# Altium PCB PCB1.PcbDoc
Units mil, origin at the board's own origin, x right, y up, seen from the top; angles counter-clockwise.
Board outline 3745 x 3075 mil, 2 copper layers (Top Layer, Bottom Layer); 34 components, 26 nets, 238 pads, 5 vias.
Unrouted connection lines stored in the file: 12.
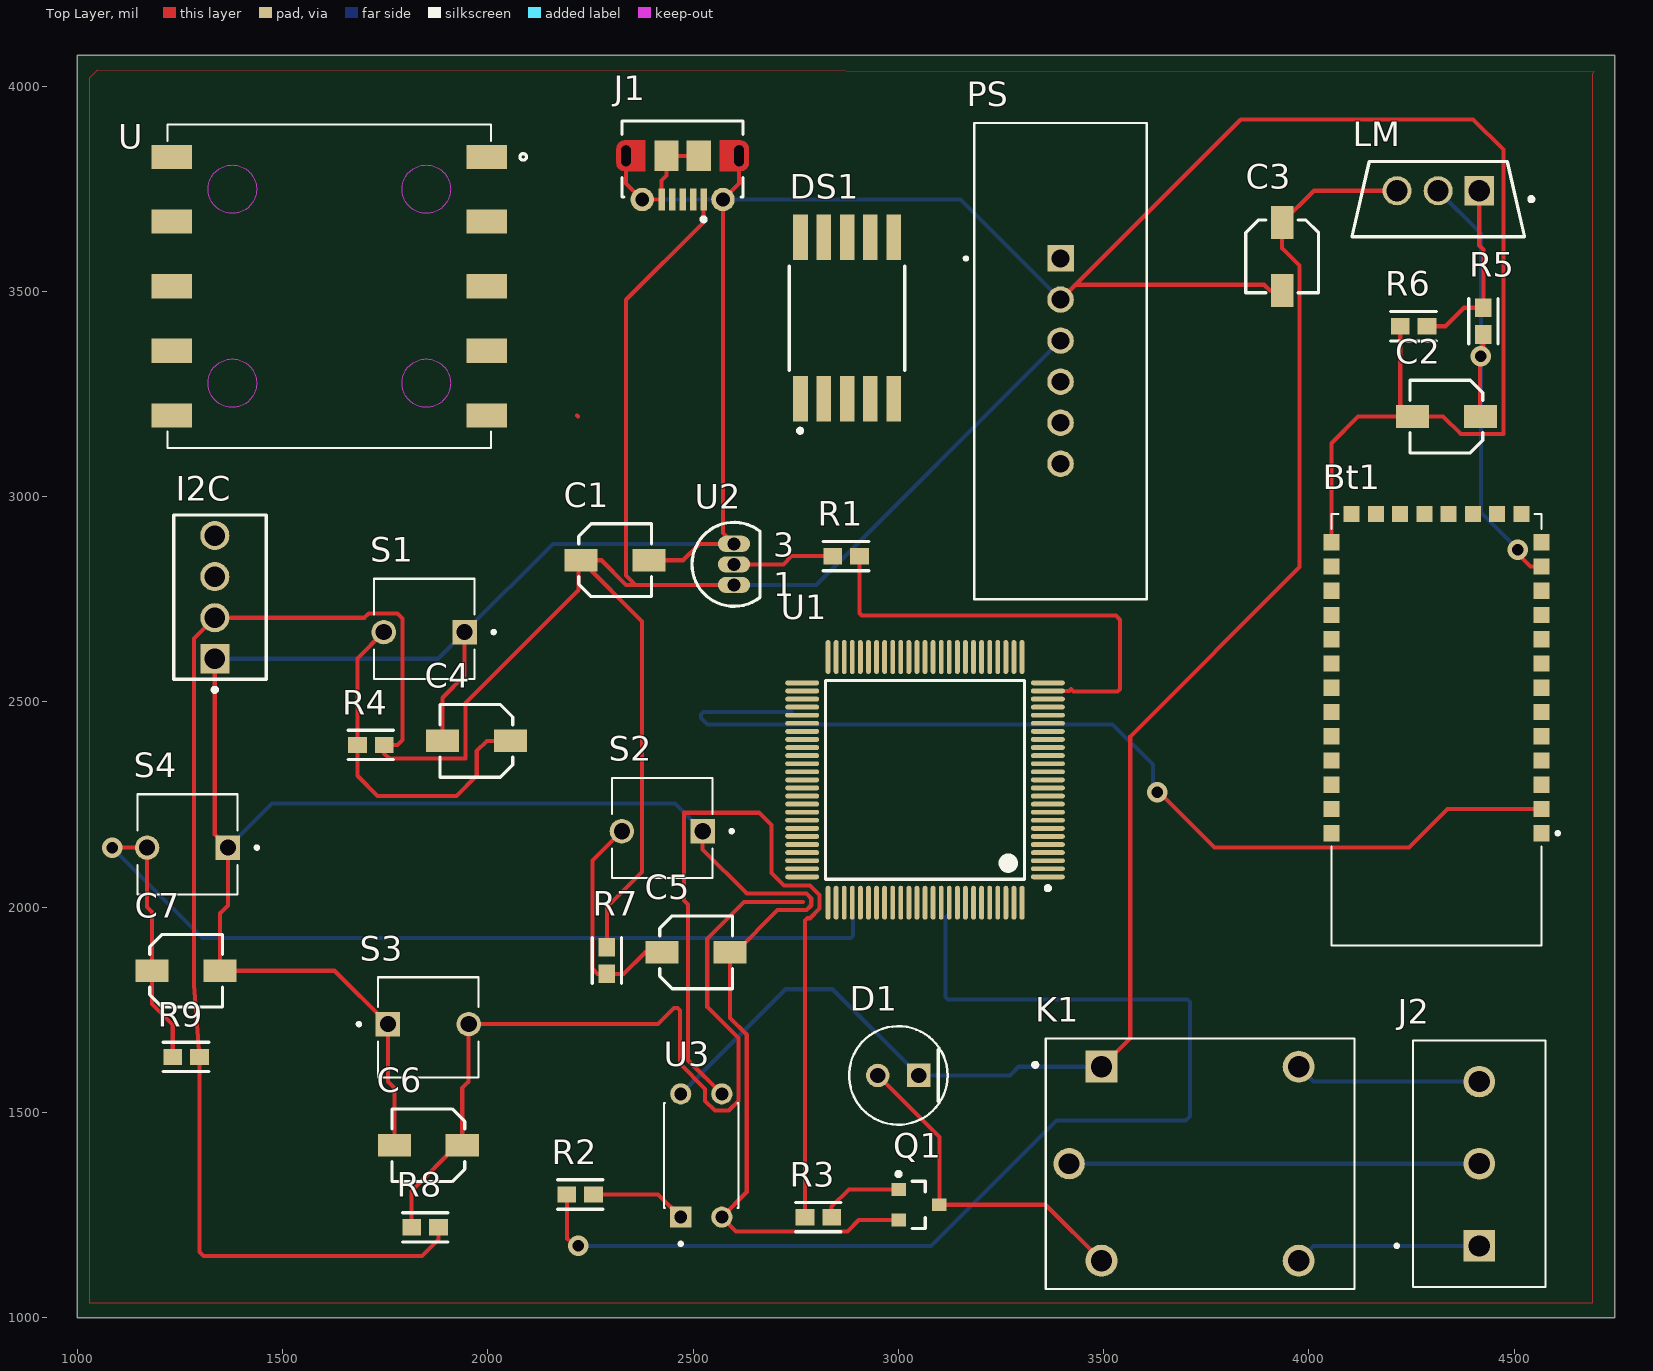
[diagram p0: Top Layer view]
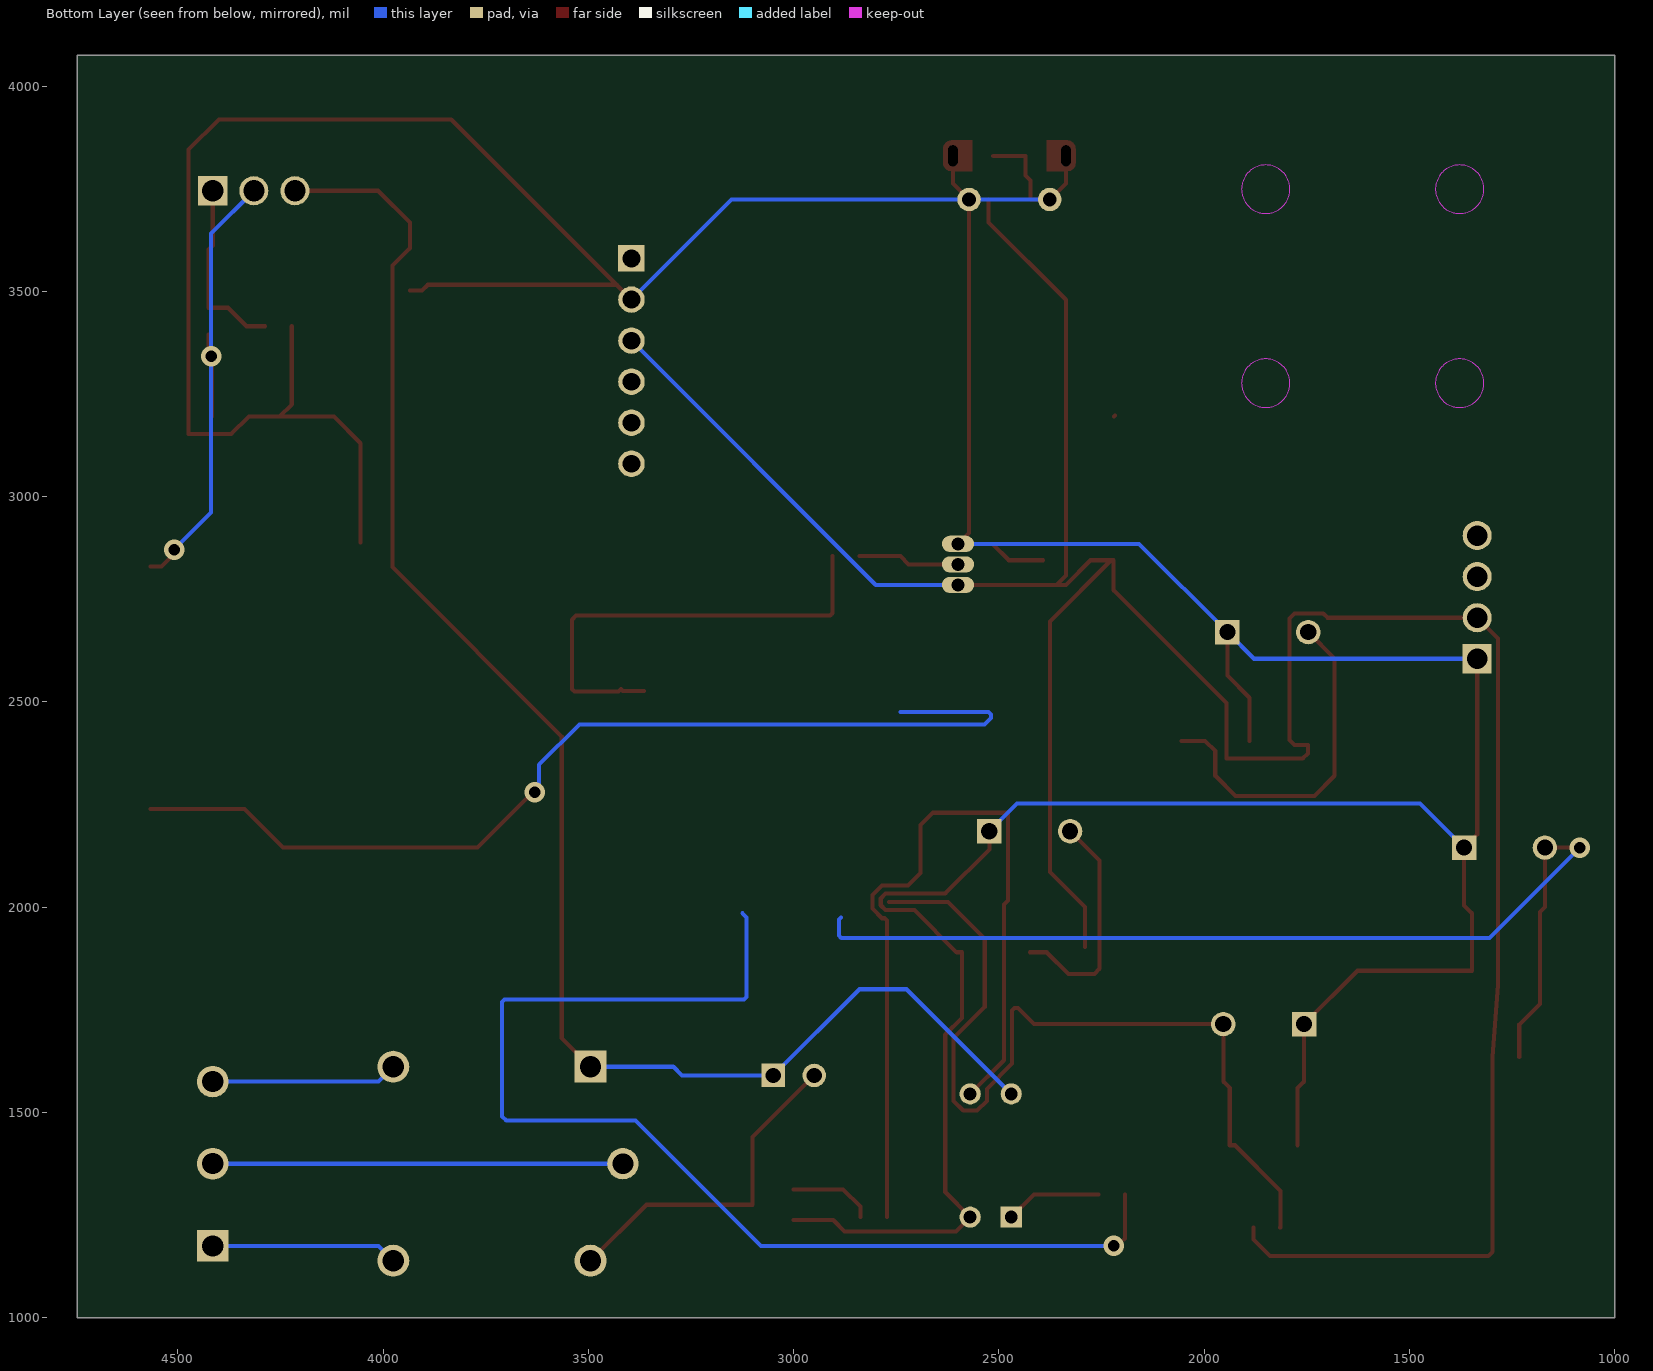
[diagram p1: Bottom Layer view, seen from below]

## Layer stack, top to bottom
Top Solder: solder mask 0.4, Solder Resist, Dk 3.5
Top Layer: signal copper 1.4
Dielectric 1: dielectric 12.6, FR-4, Dk 4.8
Bottom Layer: signal copper 1.4
Bottom Solder: solder mask 0.4, Solder Resist, Dk 3.5

## Board outline
1000,1000 4745,1000 4745,4075 1000,4075

## Design rules (kind name [scope] priority, off if disabled: settings)
Clearance [All] p1: gap=10 ignorepadtopadclearanceinfootprint=FALSE except(0: Arc-Hole Track-Hole SMDPad-Hole THPad-Hole Via-Hole Fill-Hole Poly-Hole Region-Hole Text-Hole)
PolygonConnect [All] p1: connectstyle=Relief reliefconductorwidth=10 reliefentries=4 polygonreliefangle="90 Angle" airgapwidth=10
RoutingVias [All] p1: holewidth=28 width=50 viastyle="Through Hole" minholewidth=28 minwidth=50 maxholewidth=28 maxwidth=50
SolderMaskExpansion [All] p1: expansion=4 istentingtop=FALSE
Width [All] p1: maxlimit=10 minlimit=10 preferedwidth=10
30 further rules are at their usual default settings.

## Components (designator, comment, footprint, x,y, rotation, side; value= is the part's Value field where it differs from the comment)
Bt1 "BLUETOOTH-HC-06" BLUETOOTH-SERIAL-HC-06 4310.91,2435.91 r180 top
C1 "EEE-1CA100SR" Capacitor 2309.84,2845 r0 top
C2 "EEE-1CA100SR" Capacitor 4335,3195 r180 top
C3 "EEE-1CA100SR" Capacitor 3935,3585 r270 top
C4 "EEE-1CA100SR" Capacitor 1972.32,2405 r180 top
C5 "EEE-1CA100SR" Capacitor 2507.32,1890 r0 top
C6 "EEE-1CA100SR" Capacitor 1855,1420 r180 top
C7 "EEE-1CA100SR" Capacitor 1265,1845 r0 top
D1 "HLMP-4700" Led 3000,1590 r180 top
DS1 "ACSC02-41SURKWA-F01" 7seg 2875,3435 r90 top
I2C "640456-4" Header4 1335,2755 r270 top
J1 "USB" USB-MICRO-B_V 2474.37,3776.85 r180 top
J2 "TB006" CUI_TB006-508-03BE 4415,1175 r90 top
K1 "Relay" RELAY 3735,1375 r0 top
LM "LM317KCT" LM317 4315,3724.63 r270 top
PS "PressionSensor" XDCR_MPX5010DP 3395,3330 r270 top
Q1 "MMBTA42LT1G" Transistor 3040,1275 r0 top
R1 "ESR03EZPJ331" resistor 2872.56,2855 r0 top
R2 "ESR03EZPJ331" resistor 2225,1300 r0 top
R3 "ESR03EZPJ331" resistor 2805,1245 r0 top
R4 "ESR03EZPJ331" resistor 1715,2395 r0 top
R5 "ESR03EZPJ331" resistor 4425,3427.44 r90 top
R6 "ESR03EZPJ331" resistor 4255,3415 r0 top
R7 "ESR03EZPJ331" resistor 2290,1870 r90 top
R8 "ESR03EZPJ331" resistor 1847.44,1220 r0 top
R9 "ESR03EZPJ331" resistor 1265,1635 r0 top
S1 "switcher" switcher 1845,2670 r180 top
S2 "switcher" switcher 2425,2185 r180 top
S3 "switcher" switcher 1855,1715 r0 top
S4 "switcher" switcher 1268.43,2145 r180 top
U "MouvementSensor" Mouvementsensor 1613.86,3512.52 r180 top
U1 "STM32F407VGT6J" Stm32 3065,2310 r180 top
U2 "TMP35GT9Z" TMP35 2599.84,2835 r0 top
U3 "LTV816" LTV 2520,1395 r90 top

## Footprints (in the part's own frame and the unit in brackets; to place one, negate y for a bottom-side part, rotate by r counter-clockwise, add the part's x,y. Pads: shape width x height; smd on the part's side, far side on the other; paste and mask are expansions set on the pad)
7seg [mm]
  rect 2.8x0.9 smd paste+0 mask+0: 1(-5,2.88) 2(-5,1.44) 3(-5,0) 4(-5,-1.44) 5(-5,-2.88) 6(5,-2.88) 7(5,-1.44) 8(5,0) 9(5,1.44) 10(5,2.88)
  silkscreen extent -7.1,-3.57 3.22,3.57, body extent -6.5,-3.67 6.5,3.67, height 0.25
BLUETOOTH-SERIAL-HC-06 [mm]
  rect 1x1 smd: 1(-6.5,6.5) 2(-6.5,5) 3(-6.5,3.5) 4(-6.5,2) 5(-6.5,0.5) 6(-6.5,-1) 7(-6.5,-2.5) 8(-6.5,-4) 9(-6.5,-5.5) 10(-6.5,-7) 11(-6.5,-8.5) 12(-6.5,-10) 13(-6.5,-11.5) 14(-5.25,-13.25) 15(-3.75,-13.25) 16(-2.25,-13.25) 17(-0.75,-13.25) 18(0.75,-13.25) 19(2.25,-13.25) 20(3.75,-13.25) 21(5.25,-13.25) 22(6.5,-11.5) 23(6.5,-10) 24(6.5,-8.5) 25(6.5,-7) 26(6.5,-5.5) 27(6.5,-4) 28(6.5,-2.5) 29(6.5,-1) 30(6.5,0.5) 31(6.5,2) 32(6.5,3.5) 33(6.5,5) 34(6.5,6.5)
  silkscreen extent -7.6,-13.25 6.5,13.45, body extent -7.01,-13.33 7.01,14.67, height 2.35
Capacitor [mm] "Aluminum Electrolytic Capacitor, 2-Leads, Body 4.5x4.5mm, IPC High Density"
  rect 2.05x1.4 smd: 1(-2.1,0) 2(2.1,0)
  silkscreen extent -2.25,-2.25 2.25,2.25, body extent -2.75,-2.25 2.75,2.25, height 5.5
CUI_TB006-508-03BE [mm]
  rect 1.95x1.95 / inner round 1.95 / far side rect 1.95x1.95 hole 1.3: 1(0,0)
  round 1.95 hole 1.3: 2(5.08,0) 3(10.16,0)
  silkscreen extent -2.54,-4.1 12.7,5.2, body extent -3.04,-4.1 12.7,4.1, height 10
Header4 [mm] "Through Hole, 4-Leads, Body 10.16x5.72mm, Pitch 2.54mm"
  rect 1.8x1.8 hole 1.27 paste+0: 1(3.81,0)
  round 1.8 hole 1.27 paste+0: 2(1.27,0) 3(-1.27,0) 4(-3.81,0)
  silkscreen extent -5.08,-2.54 5.86,3.18, body extent -5.08,-2.54 5.08,3.18, height 10.03
Led [mm]
  rect 1.45x1.45 hole 0.95 paste-1000 mask+0: 1(-1.27,0)
  round 1.45 hole 0.95 paste-1000 mask+0: 2(1.27,0)
  silkscreen extent -3.05,-3.05 3.05,3.05, body extent -3.15,-3.15 3.15,3.15, height 0.25
LM317 [mm]
  rect 1.8x1.8 hole 1.3 paste-1000 mask+0: 1(-0.517,2.54)
  round 1.8 hole 1.3 paste-1000 mask+0: 2(-0.517,0) 3(-0.517,-2.54)
  silkscreen extent -2.33,-5.34 2.33,5.89, body extent -2.42,-5.44 2.42,5.44, height 0.25
LTV [mm]
  rect 1.308x1.308 / inner round 1.308 / far side rect 1.308x1.308 hole 0.8: 1(-3.81,1.27)
  round 1.308 hole 0.8: 2(-3.81,-1.27) 3(3.81,-1.27) 4(3.81,1.27)
  silkscreen extent -5.56,-2.3 3.25,2.3, body extent -3.99,-2.3 3.99,2.3, height 5
Mouvementsensor [mm]
  rect 2.5x1.5 smd: 1(-9.75,-8) 2(-9.75,-4) 3(-9.75,0) 4(-9.75,4) 5(-9.75,8) 6(9.75,8) 7(9.75,4) 8(9.75,0) 9(9.75,-4) 10(9.75,-8)
  Keep-Out Layer region: -5.921,7.498 -5.843,7.492 -5.765,7.482 -5.688,7.467 -5.612,7.449 -5.536,7.427 -5.462,7.4 -5.39,7.37 -5.319,7.337 -5.25,7.299 -5.183,7.258 -5.118,7.214 -5.056,7.166 -4.996,7.115 -4.939,7.061 -4.885,7.004 -4.834,6.944 -4.786,6.882 -4.742,6.817 -4.701,6.75 -4.663,6.681 -4.63,6.61 -4.6,6.538 -4.573,6.464 -4.551,6.388 -4.533,6.312 -4.518,6.235 -4.508,6.157 -4.502,6.079 -4.5,6 -4.502,5.921 -4.508,5.843 -4.518,5.765 -4.533,5.688 -4.551,5.612 -4.573,5.536 -4.6,5.462 -4.63,5.39 -4.663,5.319 -4.701,5.25 -4.742,5.183 -4.786,5.118 -4.834,5.056 -4.885,4.996 -4.939,4.939 -4.996,4.885 -5.056,4.834 -5.118,4.786 -5.183,4.742 -5.25,4.701 -5.319,4.663 -5.39,4.63 -5.462,4.6 -5.536,4.573 -5.612,4.551 -5.688,4.533 -5.765,4.518 -5.843,4.508 -5.921,4.502 -6,4.5 -6.079,4.502 -6.157,4.508 -6.235,4.518 -6.312,4.533 -6.388,4.551 -6.464,4.573 -6.538,4.6 -6.61,4.63 -6.681,4.663 -6.75,4.701 -6.817,4.742 -6.882,4.786 -6.944,4.834 -7.004,4.885 -7.061,4.939 -7.115,4.996 -7.166,5.056 -7.214,5.118 -7.258,5.183 -7.299,5.25 -7.337,5.319 -7.37,5.39 -7.4,5.462 -7.427,5.536 -7.449,5.612 -7.467,5.688 -7.482,5.765 -7.492,5.843 -7.498,5.921 -7.5,6 -7.498,6.079 -7.492,6.157 -7.482,6.235 -7.467,6.312 -7.449,6.388 -7.427,6.464 -7.4,6.538 -7.37,6.61 -7.337,6.681 -7.299,6.75 -7.258,6.817 -7.214,6.882 -7.166,6.944 -7.115,7.004 -7.061,7.061 -7.004,7.115 -6.944,7.166 -6.882,7.214 -6.817,7.258 -6.75,7.299 -6.681,7.337 -6.61,7.37 -6.538,7.4 -6.464,7.427 -6.388,7.449 -6.312,7.467 -6.235,7.482 -6.157,7.492 -6.079,7.498 -6,7.5
  Keep-Out Layer region: 6.079,7.498 6.157,7.492 6.235,7.482 6.312,7.467 6.388,7.449 6.464,7.427 6.538,7.4 6.61,7.37 6.681,7.337 6.75,7.299 6.817,7.258 6.882,7.214 6.944,7.166 7.004,7.115 7.061,7.061 7.115,7.004 7.166,6.944 7.214,6.882 7.258,6.817 7.299,6.75 7.337,6.681 7.37,6.61 7.4,6.538 7.427,6.464 7.449,6.388 7.467,6.312 7.482,6.235 7.492,6.157 7.498,6.079 7.5,6 7.498,5.921 7.492,5.843 7.482,5.765 7.467,5.688 7.449,5.612 7.427,5.536 7.4,5.462 7.37,5.39 7.337,5.319 7.299,5.25 7.258,5.183 7.214,5.118 7.166,5.056 7.115,4.996 7.061,4.939 7.004,4.885 6.944,4.834 6.882,4.786 6.817,4.742 6.75,4.701 6.681,4.663 6.61,4.63 6.538,4.6 6.464,4.573 6.388,4.551 6.312,4.533 6.235,4.518 6.157,4.508 6.079,4.502 6,4.5 5.921,4.502 5.843,4.508 5.765,4.518 5.688,4.533 5.612,4.551 5.536,4.573 5.462,4.6 5.39,4.63 5.319,4.663 5.25,4.701 5.183,4.742 5.118,4.786 5.056,4.834 4.996,4.885 4.939,4.939 4.885,4.996 4.834,5.056 4.786,5.118 4.742,5.183 4.701,5.25 4.663,5.319 4.63,5.39 4.6,5.462 4.573,5.536 4.551,5.612 4.533,5.688 4.518,5.765 4.508,5.843 4.502,5.921 4.5,6 4.502,6.079 4.508,6.157 4.518,6.235 4.533,6.312 4.551,6.388 4.573,6.464 4.6,6.538 4.63,6.61 4.663,6.681 4.701,6.75 4.742,6.817 4.786,6.882 4.834,6.944 4.885,7.004 4.939,7.061 4.996,7.115 5.056,7.166 5.118,7.214 5.183,7.258 5.25,7.299 5.319,7.337 5.39,7.37 5.462,7.4 5.536,7.427 5.612,7.449 5.688,7.467 5.765,7.482 5.843,7.492 5.921,7.498 6,7.5
  Keep-Out Layer region: 6.079,-4.502 6.157,-4.508 6.235,-4.518 6.312,-4.533 6.388,-4.551 6.464,-4.573 6.538,-4.6 6.61,-4.63 6.681,-4.663 6.75,-4.701 6.817,-4.742 6.882,-4.786 6.944,-4.834 7.004,-4.885 7.061,-4.939 7.115,-4.996 7.166,-5.056 7.214,-5.118 7.258,-5.183 7.299,-5.25 7.337,-5.319 7.37,-5.39 7.4,-5.462 7.427,-5.536 7.449,-5.612 7.467,-5.688 7.482,-5.765 7.492,-5.843 7.498,-5.921 7.5,-6 7.498,-6.079 7.492,-6.157 7.482,-6.235 7.467,-6.312 7.449,-6.388 7.427,-6.464 7.4,-6.538 7.37,-6.61 7.337,-6.681 7.299,-6.75 7.258,-6.817 7.214,-6.882 7.166,-6.944 7.115,-7.004 7.061,-7.061 7.004,-7.115 6.944,-7.166 6.882,-7.214 6.817,-7.258 6.75,-7.299 6.681,-7.337 6.61,-7.37 6.538,-7.4 6.464,-7.427 6.388,-7.449 6.312,-7.467 6.235,-7.482 6.157,-7.492 6.079,-7.498 6,-7.5 5.921,-7.498 5.843,-7.492 5.765,-7.482 5.688,-7.467 5.612,-7.449 5.536,-7.427 5.462,-7.4 5.39,-7.37 5.319,-7.337 5.25,-7.299 5.183,-7.258 5.118,-7.214 5.056,-7.166 4.996,-7.115 4.939,-7.061 4.885,-7.004 4.834,-6.944 4.786,-6.882 4.742,-6.817 4.701,-6.75 4.663,-6.681 4.63,-6.61 4.6,-6.538 4.573,-6.464 4.551,-6.388 4.533,-6.312 4.518,-6.235 4.508,-6.157 4.502,-6.079 4.5,-6 4.502,-5.921 4.508,-5.843 4.518,-5.765 4.533,-5.688 4.551,-5.612 4.573,-5.536 4.6,-5.462 4.63,-5.39 4.663,-5.319 4.701,-5.25 4.742,-5.183 4.786,-5.118 4.834,-5.056 4.885,-4.996 4.939,-4.939 4.996,-4.885 5.056,-4.834 5.118,-4.786 5.183,-4.742 5.25,-4.701 5.319,-4.663 5.39,-4.63 5.462,-4.6 5.536,-4.573 5.612,-4.551 5.688,-4.533 5.765,-4.518 5.843,-4.508 5.921,-4.502 6,-4.5
  Keep-Out Layer region: -5.921,-4.502 -5.843,-4.508 -5.765,-4.518 -5.688,-4.533 -5.612,-4.551 -5.536,-4.573 -5.462,-4.6 -5.39,-4.63 -5.319,-4.663 -5.25,-4.701 -5.183,-4.742 -5.118,-4.786 -5.056,-4.834 -4.996,-4.885 -4.939,-4.939 -4.885,-4.996 -4.834,-5.056 -4.786,-5.118 -4.742,-5.183 -4.701,-5.25 -4.663,-5.319 -4.63,-5.39 -4.6,-5.462 -4.573,-5.536 -4.551,-5.612 -4.533,-5.688 -4.518,-5.765 -4.508,-5.843 -4.502,-5.921 -4.5,-6 -4.502,-6.079 -4.508,-6.157 -4.518,-6.235 -4.533,-6.312 -4.551,-6.388 -4.573,-6.464 -4.6,-6.538 -4.63,-6.61 -4.663,-6.681 -4.701,-6.75 -4.742,-6.817 -4.786,-6.882 -4.834,-6.944 -4.885,-7.004 -4.939,-7.061 -4.996,-7.115 -5.056,-7.166 -5.118,-7.214 -5.183,-7.258 -5.25,-7.299 -5.319,-7.337 -5.39,-7.37 -5.462,-7.4 -5.536,-7.427 -5.612,-7.449 -5.688,-7.467 -5.765,-7.482 -5.843,-7.492 -5.921,-7.498 -6,-7.5 -6.079,-7.498 -6.157,-7.492 -6.235,-7.482 -6.312,-7.467 -6.388,-7.449 -6.464,-7.427 -6.538,-7.4 -6.61,-7.37 -6.681,-7.337 -6.75,-7.299 -6.817,-7.258 -6.882,-7.214 -6.944,-7.166 -7.004,-7.115 -7.061,-7.061 -7.115,-7.004 -7.166,-6.944 -7.214,-6.882 -7.258,-6.817 -7.299,-6.75 -7.337,-6.681 -7.37,-6.61 -7.4,-6.538 -7.427,-6.464 -7.449,-6.388 -7.467,-6.312 -7.482,-6.235 -7.492,-6.157 -7.498,-6.079 -7.5,-6 -7.498,-5.921 -7.492,-5.843 -7.482,-5.765 -7.467,-5.688 -7.449,-5.612 -7.427,-5.536 -7.4,-5.462 -7.37,-5.39 -7.337,-5.319 -7.299,-5.25 -7.258,-5.183 -7.214,-5.118 -7.166,-5.056 -7.115,-4.996 -7.061,-4.939 -7.004,-4.885 -6.944,-4.834 -6.882,-4.786 -6.817,-4.742 -6.75,-4.701 -6.681,-4.663 -6.61,-4.63 -6.538,-4.6 -6.464,-4.573 -6.388,-4.551 -6.312,-4.533 -6.235,-4.518 -6.157,-4.508 -6.079,-4.502 -6,-4.5
  Keep-Out Layer region: -5.921,7.498 -5.843,7.492 -5.765,7.482 -5.688,7.467 -5.612,7.449 -5.536,7.427 -5.462,7.4 -5.39,7.37 -5.319,7.337 -5.25,7.299 -5.183,7.258 -5.118,7.214 -5.056,7.166 -4.996,7.115 -4.939,7.061 -4.885,7.004 -4.834,6.944 -4.786,6.882 -4.742,6.817 -4.701,6.75 -4.663,6.681 -4.63,6.61 -4.6,6.538 -4.573,6.464 -4.551,6.388 -4.533,6.312 -4.518,6.235 -4.508,6.157 -4.502,6.079 -4.5,6 -4.502,5.921 -4.508,5.843 -4.518,5.765 -4.533,5.688 -4.551,5.612 -4.573,5.536 -4.6,5.462 -4.63,5.39 -4.663,5.319 -4.701,5.25 -4.742,5.183 -4.786,5.118 -4.834,5.056 -4.885,4.996 -4.939,4.939 -4.996,4.885 -5.056,4.834 -5.118,4.786 -5.183,4.742 -5.25,4.701 -5.319,4.663 -5.39,4.63 -5.462,4.6 -5.536,4.573 -5.612,4.551 -5.688,4.533 -5.765,4.518 -5.843,4.508 -5.921,4.502 -6,4.5 -6.079,4.502 -6.157,4.508 -6.235,4.518 -6.312,4.533 -6.388,4.551 -6.464,4.573 -6.538,4.6 -6.61,4.63 -6.681,4.663 -6.75,4.701 -6.817,4.742 -6.882,4.786 -6.944,4.834 -7.004,4.885 -7.061,4.939 -7.115,4.996 -7.166,5.056 -7.214,5.118 -7.258,5.183 -7.299,5.25 -7.337,5.319 -7.37,5.39 -7.4,5.462 -7.427,5.536 -7.449,5.612 -7.467,5.688 -7.482,5.765 -7.492,5.843 -7.498,5.921 -7.5,6 -7.498,6.079 -7.492,6.157 -7.482,6.235 -7.467,6.312 -7.449,6.388 -7.427,6.464 -7.4,6.538 -7.37,6.61 -7.337,6.681 -7.299,6.75 -7.258,6.817 -7.214,6.882 -7.166,6.944 -7.115,7.004 -7.061,7.061 -7.004,7.115 -6.944,7.166 -6.882,7.214 -6.817,7.258 -6.75,7.299 -6.681,7.337 -6.61,7.37 -6.538,7.4 -6.464,7.427 -6.388,7.449 -6.312,7.467 -6.235,7.482 -6.157,7.492 -6.079,7.498 -6,7.5
  Keep-Out Layer region: 6.079,7.498 6.157,7.492 6.235,7.482 6.312,7.467 6.388,7.449 6.464,7.427 6.538,7.4 6.61,7.37 6.681,7.337 6.75,7.299 6.817,7.258 6.882,7.214 6.944,7.166 7.004,7.115 7.061,7.061 7.115,7.004 7.166,6.944 7.214,6.882 7.258,6.817 7.299,6.75 7.337,6.681 7.37,6.61 7.4,6.538 7.427,6.464 7.449,6.388 7.467,6.312 7.482,6.235 7.492,6.157 7.498,6.079 7.5,6 7.498,5.921 7.492,5.843 7.482,5.765 7.467,5.688 7.449,5.612 7.427,5.536 7.4,5.462 7.37,5.39 7.337,5.319 7.299,5.25 7.258,5.183 7.214,5.118 7.166,5.056 7.115,4.996 7.061,4.939 7.004,4.885 6.944,4.834 6.882,4.786 6.817,4.742 6.75,4.701 6.681,4.663 6.61,4.63 6.538,4.6 6.464,4.573 6.388,4.551 6.312,4.533 6.235,4.518 6.157,4.508 6.079,4.502 6,4.5 5.921,4.502 5.843,4.508 5.765,4.518 5.688,4.533 5.612,4.551 5.536,4.573 5.462,4.6 5.39,4.63 5.319,4.663 5.25,4.701 5.183,4.742 5.118,4.786 5.056,4.834 4.996,4.885 4.939,4.939 4.885,4.996 4.834,5.056 4.786,5.118 4.742,5.183 4.701,5.25 4.663,5.319 4.63,5.39 4.6,5.462 4.573,5.536 4.551,5.612 4.533,5.688 4.518,5.765 4.508,5.843 4.502,5.921 4.5,6 4.502,6.079 4.508,6.157 4.518,6.235 4.533,6.312 4.551,6.388 4.573,6.464 4.6,6.538 4.63,6.61 4.663,6.681 4.701,6.75 4.742,6.817 4.786,6.882 4.834,6.944 4.885,7.004 4.939,7.061 4.996,7.115 5.056,7.166 5.118,7.214 5.183,7.258 5.25,7.299 5.319,7.337 5.39,7.37 5.462,7.4 5.536,7.427 5.612,7.449 5.688,7.467 5.765,7.482 5.843,7.492 5.921,7.498 6,7.5
  Keep-Out Layer region: 6.079,-4.502 6.157,-4.508 6.235,-4.518 6.312,-4.533 6.388,-4.551 6.464,-4.573 6.538,-4.6 6.61,-4.63 6.681,-4.663 6.75,-4.701 6.817,-4.742 6.882,-4.786 6.944,-4.834 7.004,-4.885 7.061,-4.939 7.115,-4.996 7.166,-5.056 7.214,-5.118 7.258,-5.183 7.299,-5.25 7.337,-5.319 7.37,-5.39 7.4,-5.462 7.427,-5.536 7.449,-5.612 7.467,-5.688 7.482,-5.765 7.492,-5.843 7.498,-5.921 7.5,-6 7.498,-6.079 7.492,-6.157 7.482,-6.235 7.467,-6.312 7.449,-6.388 7.427,-6.464 7.4,-6.538 7.37,-6.61 7.337,-6.681 7.299,-6.75 7.258,-6.817 7.214,-6.882 7.166,-6.944 7.115,-7.004 7.061,-7.061 7.004,-7.115 6.944,-7.166 6.882,-7.214 6.817,-7.258 6.75,-7.299 6.681,-7.337 6.61,-7.37 6.538,-7.4 6.464,-7.427 6.388,-7.449 6.312,-7.467 6.235,-7.482 6.157,-7.492 6.079,-7.498 6,-7.5 5.921,-7.498 5.843,-7.492 5.765,-7.482 5.688,-7.467 5.612,-7.449 5.536,-7.427 5.462,-7.4 5.39,-7.37 5.319,-7.337 5.25,-7.299 5.183,-7.258 5.118,-7.214 5.056,-7.166 4.996,-7.115 4.939,-7.061 4.885,-7.004 4.834,-6.944 4.786,-6.882 4.742,-6.817 4.701,-6.75 4.663,-6.681 4.63,-6.61 4.6,-6.538 4.573,-6.464 4.551,-6.388 4.533,-6.312 4.518,-6.235 4.508,-6.157 4.502,-6.079 4.5,-6 4.502,-5.921 4.508,-5.843 4.518,-5.765 4.533,-5.688 4.551,-5.612 4.573,-5.536 4.6,-5.462 4.63,-5.39 4.663,-5.319 4.701,-5.25 4.742,-5.183 4.786,-5.118 4.834,-5.056 4.885,-4.996 4.939,-4.939 4.996,-4.885 5.056,-4.834 5.118,-4.786 5.183,-4.742 5.25,-4.701 5.319,-4.663 5.39,-4.63 5.462,-4.6 5.536,-4.573 5.612,-4.551 5.688,-4.533 5.765,-4.518 5.843,-4.508 5.921,-4.502 6,-4.5
  Keep-Out Layer region: -5.921,-4.502 -5.843,-4.508 -5.765,-4.518 -5.688,-4.533 -5.612,-4.551 -5.536,-4.573 -5.462,-4.6 -5.39,-4.63 -5.319,-4.663 -5.25,-4.701 -5.183,-4.742 -5.118,-4.786 -5.056,-4.834 -4.996,-4.885 -4.939,-4.939 -4.885,-4.996 -4.834,-5.056 -4.786,-5.118 -4.742,-5.183 -4.701,-5.25 -4.663,-5.319 -4.63,-5.39 -4.6,-5.462 -4.573,-5.536 -4.551,-5.612 -4.533,-5.688 -4.518,-5.765 -4.508,-5.843 -4.502,-5.921 -4.5,-6 -4.502,-6.079 -4.508,-6.157 -4.518,-6.235 -4.533,-6.312 -4.551,-6.388 -4.573,-6.464 -4.6,-6.538 -4.63,-6.61 -4.663,-6.681 -4.701,-6.75 -4.742,-6.817 -4.786,-6.882 -4.834,-6.944 -4.885,-7.004 -4.939,-7.061 -4.996,-7.115 -5.056,-7.166 -5.118,-7.214 -5.183,-7.258 -5.25,-7.299 -5.319,-7.337 -5.39,-7.37 -5.462,-7.4 -5.536,-7.427 -5.612,-7.449 -5.688,-7.467 -5.765,-7.482 -5.843,-7.492 -5.921,-7.498 -6,-7.5 -6.079,-7.498 -6.157,-7.492 -6.235,-7.482 -6.312,-7.467 -6.388,-7.449 -6.464,-7.427 -6.538,-7.4 -6.61,-7.37 -6.681,-7.337 -6.75,-7.299 -6.817,-7.258 -6.882,-7.214 -6.944,-7.166 -7.004,-7.115 -7.061,-7.061 -7.115,-7.004 -7.166,-6.944 -7.214,-6.882 -7.258,-6.817 -7.299,-6.75 -7.337,-6.681 -7.37,-6.61 -7.4,-6.538 -7.427,-6.464 -7.449,-6.388 -7.467,-6.312 -7.482,-6.235 -7.492,-6.157 -7.498,-6.079 -7.5,-6 -7.498,-5.921 -7.492,-5.843 -7.482,-5.765 -7.467,-5.688 -7.449,-5.612 -7.427,-5.536 -7.4,-5.462 -7.37,-5.39 -7.337,-5.319 -7.299,-5.25 -7.258,-5.183 -7.214,-5.118 -7.166,-5.056 -7.115,-4.996 -7.061,-4.939 -7.004,-4.885 -6.944,-4.834 -6.882,-4.786 -6.817,-4.742 -6.75,-4.701 -6.681,-4.663 -6.61,-4.63 -6.538,-4.6 -6.464,-4.573 -6.388,-4.551 -6.312,-4.533 -6.235,-4.518 -6.157,-4.508 -6.079,-4.502 -6,-4.5
  silkscreen extent -12.2,-10 10,10, body extent -9.75,-10 10.25,10, height 2.84
RELAY [mm]
  rect 1.98x1.98 / inner round 1.98 / far side rect 1.98x1.98 hole 1.32: A1(-6.1,6)
  round 1.98 hole 1.32: A2(-6.1,-6) NC(6.1,6) NO(6.1,-6)
  round 1.935 hole 1.29: COM(-8.1,0)
  silkscreen extent -10.3,-7.75 9.55,7.75, body extent -9.6,-7.8 9.6,7.8, height 15.8
resistor [mil]
  rect 45.6x39.85 smd paste+0 mask+0: 1(-32.56,0) 2(32.56,0)
  silkscreen extent -55,-36 55,36, body extent -75,-40 75,40, height 10
Stm32 [mm] "Thin QFP, 100-Leads, Body 14x14mm, Pitch 0.5mm, IPC Low Density"
  oval 2.1x0.3 smd: 1(-7.6,6) 2(-7.6,5.5) 3(-7.6,5) 4(-7.6,4.5) 5(-7.6,4) 6(-7.6,3.5) 7(-7.6,3) 8(-7.6,2.5) 9(-7.6,2) 10(-7.6,1.5) 11(-7.6,1) 12(-7.6,0.5) 13(-7.6,0) 14(-7.6,-0.5) 15(-7.6,-1) 16(-7.6,-1.5) 17(-7.6,-2) 18(-7.6,-2.5) 19(-7.6,-3) 20(-7.6,-3.5) 21(-7.6,-4) 22(-7.6,-4.5) 23(-7.6,-5) 24(-7.6,-5.5) 25(-7.6,-6) 51(7.6,-6) 52(7.6,-5.5) 53(7.6,-5) 54(7.6,-4.5) 55(7.6,-4) 56(7.6,-3.5) 57(7.6,-3) 58(7.6,-2.5) 59(7.6,-2) 60(7.6,-1.5) 61(7.6,-1) 62(7.6,-0.5) 63(7.6,0) 64(7.6,0.5) 65(7.6,1) 66(7.6,1.5) 67(7.6,2) 68(7.6,2.5) 69(7.6,3) 70(7.6,3.5) 71(7.6,4) 72(7.6,4.5) 73(7.6,5) 74(7.6,5.5) 75(7.6,6)
  oval 0.3x2.1 smd: 26(-6,-7.6) 27(-5.5,-7.6) 28(-5,-7.6) 29(-4.5,-7.6) 30(-4,-7.6) 31(-3.5,-7.6) 32(-3,-7.6) 33(-2.5,-7.6) 34(-2,-7.6) 35(-1.5,-7.6) 36(-1,-7.6) 37(-0.5,-7.6) 38(0,-7.6) 39(0.5,-7.6) 40(1,-7.6) 41(1.5,-7.6) 42(2,-7.6) 43(2.5,-7.6) 44(3,-7.6) 45(3.5,-7.6) 46(4,-7.6) 47(4.5,-7.6) 48(5,-7.6) 49(5.5,-7.6) 50(6,-7.6) 76(6,7.6) 77(5.5,7.6) 78(5,7.6) 79(4.5,7.6) 80(4,7.6) 81(3.5,7.6) 82(3,7.6) 83(2.5,7.6) 84(2,7.6) 85(1.5,7.6) 86(1,7.6) 87(0.5,7.6) 88(0,7.6) 89(-0.5,7.6) 90(-1,7.6) 91(-1.5,7.6) 92(-2,7.6) 93(-2.5,7.6) 94(-3,7.6) 95(-3.5,7.6) 96(-4,7.6) 97(-4.5,7.6) 98(-5,7.6) 99(-5.5,7.6) 100(-6,7.6)
  silkscreen extent -7.73,-6.15 6.15,6.82, body extent -7,-7 7,7, height 1.6
switcher [mm]
  rect 1.508x1.508 / inner round 1.508 / far side rect 1.508x1.508 hole 1: 1(-2.5,0)
  round 1.508 hole 1: 2(2.5,0)
  silkscreen extent -4.39,-3.3 3.1,2.9, body extent -3.1,-3.3 3.1,2.9, height 4.3
TMP35 [mm] "TO, Flat Index; 3 In-Line, Axial Leads; Body Dia. 5.1mm; Leads 0.48 x 0.48 mm (max)"
  oval 2x1 hole 0.8: 1(0,-1.27) 2(0,0) 3(0,1.27)
  silkscreen extent -2.6,-2.6 1.6,2.6, body extent -2.6,-2.61 1.6,2.61, height 5.33
Transistor [mm] "SOT23, 3-Leads, Body 2.92x1.3mm, Pitch 0.95mm"
  rect 0.9x0.8 smd: 1(-1,0.95) 2(-1,-0.95) 3(1.524,0)
  silkscreen extent -1.12,-1.46 0.65,2.02, body extent -1.07,-1.45 1.33,1.45, height 1.15
USB-MICRO-B_V [mm] "USB, MICRO B, Body 7.491x4.695 mm, Pitch 0.65 mm"
  rect 0.4x1.35 smd: 1(-1.3,1.35) 2(-0.65,1.35) 3(0,1.35) 4(0.65,1.35) 5(1.3,1.35)
  round 1.45 hole 0.85: 6(-2.5,1.35) 7(2.5,1.35)
  rrect50% 0x0 hole 0.6 slot 1.3 at 90 deg: 8(-3.5,-1.35) 11(3.5,-1.35)
  rect 1.5x1.9 smd: 9(-1,-1.35) 10(1,-1.35)
  Top Layer region: -3.6,-1.8 -3.6,-0.9 -4.1,-0.9 -4.1,-1.8
  Top Layer region: 3.6,-0.9 3.6,-1.8 4.1,-1.8 4.1,-0.9
  Top Layer region: 2.3,-0.4 2.3,-2.3 3.6,-2.3 3.6,-0.4
  Top Layer region: -2.3,-2.3 -2.3,-0.4 -3.6,-0.4 -3.6,-2.3
  Top Layer lines w0.5: 3.5,-0.671 ccw(c3.6,-0.9) 3.35,-0.9 ccw(c3.6,-0.9) 3.5,-1.129 ccw(c3.6,-0.9) 3.5,-0.671 ; 3.408,-1.64 ccw(c3.6,-1.8) 3.35,-1.8 ccw(c3.6,-1.8) 3.408,-1.64 ; -3.5,-0.671 ccw(c-3.6,-0.9) -3.85,-0.9 ccw(c-3.6,-0.9) -3.5,-1.129 ccw(c-3.6,-0.9) -3.5,-0.671 ; -3.5,-1.571 ccw(c-3.6,-1.8) -3.85,-1.8 ccw(c-3.6,-1.8) -3.5,-1.571
  silkscreen extent -3.75,-3.5 3.75,2.7, body extent -4.1,-3.9 4.1,1.5, height 2.67
XDCR_MPX5010DP [mm]
  rect 1.64x1.64 hole 1.09: 1(-6.35,0)
  round 1.64 hole 1.09: 2(-3.81,0) 3(-1.27,0) 4(1.27,0) 5(3.81,0) 6(6.35,0)
  silkscreen extent -14.73,-5.95 14.73,5.34, body extent -14.73,-5.74 14.73,5.72, height 32.58

## Part data
Bt1: "Bluetooth Modules (802.15.1) BLUETOOTH-SERIAL-HC-06", Package=None, Availability="Not in stock", Check_prices=https://www.snapeda.com/parts/BLUETOOTH-SERIAL-HC-06/Olimex/view-part/?ref=eda, MF=Olimex, MP=BLUETOOTH-SERIAL-HC-06, Price=None, SnapEDA_Link=https://www.snapeda.com/parts/BLUETOOTH-SERIAL-HC-06/Olimex/view-part/?ref=snap
C1 C2 C3 C4 C5 C6 C7: library part Capacitor, "Aluminum Electrolytic Capacitor, 10 uF, +/- 20%, -40 to 85 degC, 2-Pin SMD, RoHS, Tape and Reel", AC Ripple Current=28mA, AE Capacitor Case=RadialCan-SMD, Capacitance=10µF, Capacitance Tolerance=±20%, Capacitor Mounting=SMD, Leakage Current=3µA, Life Time @ Temperature=2000hours@85°C, Manufacturer=Panasonic, Operating Life Temperature=85°C, Operating life Time=2000h, Operating Temperature Min=-40°C, Operating Temperature Range=-40°Cto+85°C, Package / Case=B, Package Description="2-Pin Surface Mount Device, Body 4.5 x 4.5 mm", Package Reference=EEE1CA100SR, Power Factor=0.16, Power Factor Frequency=120Hz, Tolerance +=20%, Voltage Rating=16V, Capacitance Tolerance ±=±20%, Capacitor Case Style=RadialCan-SMD, Capacitor Terminals=SMD, Datasheet URL=https://datasheet.ciiva.com/19458/1355487-19458346.pdf, Datasheet Version=04/2005, Diameter=4mm, External Depth=4.3mm, External Length / Height=5.4mm, External Width=4.3mm, Height=5.4mm, Lead Cross-section Width=0.65mm, Lead Length=1.8mm, Lead Spacing=1mm, Lifetime @ Temperature=2000hours@85°C, Manufacturer URL=http://www.panasonic.com/, Mounting Technology=SurfaceMount, No. of Pins=2, Operating Lifetime=2000h, Operating Temperature Max=85°C, Packaging=CutTape, Product Range=PANASONIC-SSeries, Ripple Current AC=28mA, Ripple Current Frequency=120Hz, Ripple Current Temperature=85°C, Series=VS, SVHC=NoSVHC(16-Dec-2013), Tape Width=12mm, Tolerance -=20%, Voltage Rating V DC=16V
D1: library part led, "LED RED DIFFUSED T-1 3/4 T/H", Colour=Red, Forward Current=2mA, Forward Voltage=1.7V, Manufacturer=Broadcom, Power Dissipation=14mW, Reverse Voltage=5V, Temperature="-40°C to +100°C", Temperature Range High=+100°C, Temperature Range Low=-40°C, Automotive=No, Category=Diode, ComponentLink2Description=Datasheet, ComponentLink2URL=https://docs.broadcom.com/docs/AV02-1557EN, Device Class L1=Optoelectronics, Device Class L2=LEDs, Device Class L3=unset, Digikey Description="LED RED DIFFUSED T-1 3/4 T/H", Lead Free=Yes, Led Orientation=Straight, Luminous Intensity=2.3mcd, Manufacturer Part Number=HLMP-4700, Mouser Description="LED; Red; 2.3mcd; 0.24In.Dia.; T-1-3/4; 500mA; 1.7V; 635nm; 50deg; 5V; 24mW; -55degC;", Octopart=https://octopart.com/hlmp-4700-broadcom-71130526, Package=HLMP-4700, Peak Emmision Wavelength=635nm, RoHS=TRUE, Viewing Angle=50°, Wavelength=626nm
DS1: library part 7seg, "DISPLAY 7-SEG 0.2\" SGL RED 10SMD", Case/Package=SMD/SMT, Color=Red, Forward Current=30mA, Forward Voltage=1.95V, Max Operating Temperature=85°C, Max Power Dissipation=75mW, Min Operating Temperature=-40°C, Package Quantity=650, Test Current=20mA, Element Configuration="Common Cathode", Height=0.315inch, Illumination Color=Red, Lead Free="Lead Free", Luminous Intensity=30mcd, Number of Characters=1, Operating Supply Voltage=1.95V, Packaging="Tape and Reel", Power Consumption=75mW, Wavelength=630nm, Width=0.272inch
I2C: library part Header, "Male Header, Pitch 2.54 mm, 1 x 4 Position, Height 10.03 mm, Tail Length 3.56 mm, RoHS, Bulk", Color=White, Current, Rating="5 /  / A", Flammability Rating=UL94V-0, Manufacturer="TE Connectivity", Temperature, Operating="-55to+105 /  / degC", Voltage, Rating="250 /  / V", Agency Approvals=CSA,UL, Angle=Straight, Brand/Series=MTA-100Series, Color, Housing=White, Connector Type=MTA-100, Contact Centerline Spacing="0.100 /  / in.", Contact Mating Area Plating=Tin, Contact Plating=Tin, Contact Shape=Square, Contact Termination Area Plating=Tin, Datasheet URL=https://datasheet.ciiva.com/16286/eng-ds-82056-mta-0608-16286228.pdf, Datasheet Version=Dec-14, Length, Overall="0.4 /  / \"", Length, Pin="0.14 /  / \"", Length, Terminal Post="0.14 /  / in.", Manufacturer URL=http://www.te.com/, Material, Contact=CopperAlloy, Material, Housing=Polyester, Mount Angle=Vertical, Mounting Hole Size="0.04 /  / \"", Mounting Type=PCMount, Number of Contacts=4, Number of Positions=4, Number of Rows=1, Pin Spacing="0.1 /  / \"", Primary Type=InterconnectSystem, Size, Post="0.025 /  / in.", Special Features=Pinstrip, Standards=RoHSCompliant,ELVCompliant,UL94V-0, Termination=Solder, Type=PCBPlug
J1: "Micro-USB B Receptacle, Right Angle, Bottom Mount, Surface Mount, with Solder Tabs, -30 to 85 degC, 5-Pin USB, RoHS, Tape and Reel", Manufacturer=Molex, Package Description="5-Leads USB, Micro B, Body 7.5 x 5 mm, Pitch 0.65 mm", Package Reference=MICRO-B, Package Version="Rev. F, 12/2012", Standard Package=1, Voltage - Max=30V, 3D Model=105017-0001.stp, Catalog Drawings=1050170001, Category=Connectors,Interconnects, Circuits=5, Connector Type=USB-microB, Datasheet URL=http://www.molex.com/elqNow/elqRedir.htm?ref=http://www.molex.com/webdocs/datasheets/pdf/en-us/1050170001_IO_CONNECTORS.pdf, Datasheet Version=03/2016, Family=USB,DVI,HDMIConnectors, Featured Product=Micro-USBConnectorsUSBConnectors, Features=Shielded,SolderRetention, Gender=Receptacle, Ingress Protection=-, Manufacturer URL=http://www.molex.com/, Mating Products=WM17145-ND-CABLEMICROUSBBTOSTDA1.0MWM17147-ND-CABLEMICROUSBBTOSTDA2.0MWM17146-ND-CABLEMICROUSBBTOSTDA1.5M, Mounting Technology=SurfaceMount, Mounting Type=BoardCutout,SurfaceMount,RightAngle, Number of Contacts=5, Online Catalog=Molex-MicroUSB, Other Names=WM1399DKR, Package URL=http://www.molex.com/pdm_docs/sd/1050170001_sd.pdf, Packaging=Digi-Reel®, PCN Assembly/Origin=ResinSupplier21/Oct/2015, RoHS Information=1050170001CertofCompliance, Series=-, Specifications=-
J2: "2~24 Poles, Screw Type, Horizontal, 5.08 Pitch, 26~14 (AWG), Terminal Block Connector", Package=None, Availability="In Stock", Check_prices=https://www.snapeda.com/parts/TB006-508-03BE/CUI+Devices/view-part/?ref=eda, CUI_purchase_URL=https://www.cuidevices.com/product/interconnect/connectors/terminal-blocks/tb006-508-series?utm_source=snapeda.com&utm_medium=referral&utm_campaign=snapedaBOM, MF="CUI Devices", MP=TB006-508-03BE, Price=None, Purchase-URL=https://pricing.snapeda.com/search/part/TB006-508-03BE/?ref=eda, SnapEDA_Link=https://www.snapeda.com/parts/TB006-508-03BE/CUI+Devices/view-part/?ref=snap
K1: "5V Trigger Relay Module For Arduino And Raspberry Pi 5V Trigger Relay Module For Arduino And Raspberry Pi", Package="NON STANDARD-5 Songle Relay", Availability="Not in stock", Check_prices=https://www.snapeda.com/parts/SRD-05VDC-SL-C/Songle+Relay/view-part/?ref=eda, MF="Songle Relay", MP=SRD-05VDC-SL-C, Price=None, SnapEDA_Link=https://www.snapeda.com/parts/SRD-05VDC-SL-C/Songle+Relay/view-part/?ref=snap
LM: library part LM317, "IC REG LIN POS ADJ 1.5A TO220-3", Case/Package=TO-220, Dropout Voltage=2V, Max Input Voltage=40V, Max Operating Temperature=125°C, Max Output Current=1.5A, Max Output Voltage=37V, Min Input Voltage=4.2V, Min Operating Temperature=0°C, Min Output Voltage=1.25V, Package Quantity=50, Power Rating=20W, Power Supply Rejection Ratio (PSRR)=57dB, Quiescent Current=3.5mA, Height=16.51mm, Lead Free="Lead Free", Length=10.67mm, Mount="Through Hole", Number of Outputs=1, Number of Pins=3, Number of Regulators=1, Output Current=1.5A, Output Type=Adjustable, Output Voltage=37V, Packaging=Rail/Tube, Polarity=Positive, Radiation Hardening=No, REACH SVHC="No SVHC", Reference Voltage=1.25V, RoHS Compliant=Yes, Series=LM317, Weight=0.211644oz, Width=4.65mm
PS: "Pressure Sensor 1.45PSI _10kPa_ Differential Male - 0.19 _4.93mm_ Tube 0.2 V ~ 4.7 V 6-SIP Module", Package="SIP-6 NXP Semiconductors", Availability=Unavailable, MF="NXP USA", MP=MPX5010DP, Price=None, SnapEDA_Link=https://www.snapeda.com/parts/MPX5010DP/NXP%20USA%20Inc./view-part/597709/?ref=snap
Q1: library part Transistor, "High Voltage Transistor, NPN Silicon, 3-Pin SOT-23, Pb-Free, Tape and Reel", Manufacturer="On Semiconductor", ComponentLink1Description="Manufacturer URL", ComponentLink1URL=http://www.onsemi.com/, ComponentLink2Description=Datasheet, ComponentLink2URL=http://www.onsemi.cn/pub_link/Collateral/MMBTA42LT1-D.PDF, ComponentLink3Description="Package Specification", ComponentLink3URL=http://www.onsemi.cn/pub_link/Collateral/318-08.PDF, DatasheetVersion="Rev. 12", fT Min (MHz)=50, IC Continuous (A)=0.5, Mounting Technology="Surface Mount", PackageDescription="3-Pin Small Outline Transistor, Body 2.92 x 1.3 mm, Pitch 0.95 mm", PackageReference=SOT-23-3-318-08, PackageVersion="Rev. AP, 11/2009", Packing="Tape and Reel", PartNumber=MMBTA42LT1G, Polarity=NPN, RoHS=TRUE
R1 R2 R3 R4 R5 R6 R7 R8 R9: library part Resistor, "330Ω ±5% 0.25W 0603 Anti-Surge Chip Resistor AEC-Q200", Case Code (Imperial)=0603, Case Code (Metric)=1608, Max Operating Temperature=155°C, Max Power Dissipation=250mW, Min Operating Temperature=-55°C, Resistance=330R, Temperature Coefficient=200ppm/°C, Tolerance=5%, Case/Package=0603, Features="Automotive AEC-Q200", Height=0.45mm, Length=1.6mm, Number of Terminations=2, Packaging="Tape and Reel", RoHS Compliant=Yes, Series=ESR, Width=0.8mm
S1 S2 S3 S4: "SWITCH TACTILE SPST-NO 0.05A 12V", Package=None, Availability="In Stock", Check_prices=https://www.snapeda.com/parts/TL59NF160Q/E-Switch/view-part/?ref=eda, MF=E-Switch, MP=TL59NF160Q, Price=None, Purchase-URL=https://pricing.snapeda.com/search/part/TL59NF160Q/?ref=eda, SnapEDA_Link=https://www.snapeda.com/parts/TL59NF160Q/E-Switch/view-part/?ref=snap
U: "SENSOR GAS O3 SMT", Package=None, Availability=Bad, DigiKey-Purchase-URL=https://snapeda.com/shop?store=DigiKey&id=4872318, MF="SPEC Sensors, LLC", MP=110-407, Price=None, SnapEDA_Link=https://www.snapeda.com/parts/110-407/SPEC%20Sensors/view-part/4872318/?ref=snap
U1: library part Stm, "ARM Cortex-M4 32-bit MCU+FPU, 210 DMIPS, 1024 kB Flash, 192 kB Internal RAM, 82 I/Os, 100-pin LQFP, -40 to 85 degC, Tray", I/Os (High Current)=82, Manufacturer=STMicroelectronics, Operating Frequency(F) (Processor speed) (MHz)=168, Supply Voltage(Vcc) max (V)=3.6, Supply Voltage(Vcc) min (V)=1.8, ComponentLink1Description="Manufacturer URL", ComponentLink1URL=http://www.st.com/web/en/home.html, ComponentLink2Description=Datasheet, ComponentLink2URL=http://www.st.com/st-web-ui/static/active/en/resource/technical/document/datasheet/DM00037051.pdf, ComponentLink3Description="Package Specification", ComponentLink3URL=http://www.st.com/st-web-ui/static/active/en/resource/technical/document/data_brief/DM00071938.pdf, Core="ARM Cortex-M4", D/A Converter=2x12-bit, DatasheetVersion="Rev. 4", FLASH Size (Prog) (kB)=1024, Internal RAM Size (kB)=192, Mounting Technology="Surface Mount", PackageDescription="100-Pin Low Profile Quad Flat Package, 14 x 14 mm Body, 0.5 mm Pitch", PackageReference=LQFP100, PackageVersion="Rev. 1, 06/2013", Packing=Tray, PartNumber=STM32F407VGT6J
U2: library part TMP35, "Voltage Output Temperature Sensor, 2.7 to 5.5 V Supply, Industrial, 3-pin TO92 (T-3), Tray", Manufacturer="Analog Devices", Supply Voltage Range="2.7 to 5.5 V", Code_JEDEC=TO-226-AA, ComponentLink1Description="Manufacturer URL", ComponentLink1URL=http://www.analog.com/en/index.html, ComponentLink2Description=Datasheet, ComponentLink2URL=http://www.analog.com/static/imported-files/data_sheets/TMP35_36_37.pdf, ComponentLink3Description="Package Specification", ComponentLink3URL=http://www.analog.com/static/imported-files/packages/PKG_PDF/TO-92(T)/T_3.pdf, ComponentLink4Description="Product URL", ComponentLink4URL=http://www.analog.com/en/mems-sensors/digital-temperature-sensors/tmp35/products/product.html, DatasheetVersion="Rev. F", Mounting Technology="Through Hole", PackageDescription="3-Pin Plastic Header-Style Package, 1.27 mm Pitch", PackageReference=T-3, PackageVersion="042208-A, 04/2008", Packing=Tray, PartNumber=TMP35GT9Z
U3: "Optoisolator Transistor Output 5000Vrms 1 Channel 4-DIP", Package="PDIP-4 Lite-On", Availability="In Stock", Check_prices=https://www.snapeda.com/parts/LTV816/Lite-On+Inc./view-part/?ref=eda, MF="Lite-On Inc.", MP=LTV816, Price=None, Purchase-URL=https://pricing.snapeda.com/search/part/LTV816/?ref=eda, SnapEDA_Link=https://www.snapeda.com/parts/LTV816/Lite-On+Inc./view-part/?ref=snap

## Via types
v1: diameter 50, hole 28, Top Layer to Bottom Layer, 5 vias

## Nets (pads, with @x,y where several pads share a name; then routed paths per layer and width w, separated by ;. In a path a pad name is that pad's centre, name@x,y a point inside that pad or via, vN(x,y) a via of type N, cw(c..) or ccw(c..) an arc to the next point about the centre after c; other vN are vias at no path point)
+12: C3.1 D1.1 K1.A1 LM.3 U3.4 | length 3812.3
  Top Layer w10: K1.A1 3565,1681.38 3565,2415.63 3977.56,2828.19 3977.56,3562.44 3935,3605 C3.1 4012.32,3745 LM.3
  Bottom Layer w10: U3.4 2725,1800 2840,1800 D1.1 3272,1590 3293.22,1611.22 K1.A1
GND: Bt1.22 C1.2 C2.2 C3.2 C4.2 C5.2 C6.2 C7.2 I2C.1 J1.5 J1.6 J1.7 J1.8 J1.9 J1.10 J1.11 PS.2 Q1.2 R6.1 S1.1 S2.1 S3.1 S4.1 U2.3 U3.2 | length 12358.1
  Top Layer w10: I2C.1 1335,2176.85 S4.1 1366.85,2004.17 1347.68,1985 C7.2 1626.57,1845 S3.1 1756.57,1574.75 1772.32,1559 C6.2 ; C4.2 1889.65,2510 1943.43,2563.78 S1.1 ; J1.11@2342.48,3847.72 2340.19,3841.41 2336.57,3831.43 J1.11 2336.57,3821.3 2336.57,3803.26 2336.57,3763.07 J1.7 J1.5 2423.19,3770 2435,3781.81 J1.10 J1.9 ; C1.2 2476,2845 2516,2885 U2.3@2599,2885 ; S2.1 2523.43,2140.31 2630.87,2032.87 2776.16,2032.87 2787.87,2021.16 2787.87,2004.59 2776.16,1992.87 2705.67,1992.87 2602.8,1890 C5.2 2590,1730 2630.75,1689.25 2630.75,1305.75 U3.2 2605,1210 2876,1210 2903.6,1237.6 Q1.2 ; U2.3 U2.3@2599,2885 ; J1.8@2625.94,3847.72 2612.17,3839.83 2612.17,3838.7 J1.8 2612.17,3821.3 2612.17,3803.26 2612.17,3763.07 J1.6 2572.8,2911.2 U2.3@2599,2885 ; PS.2 3430.92,3515.92 ; C3.2 3904.93,3502.32 3891.32,3515.92 3430.92,3515.92 ; Bt1.22 4055,3130 4120,3195 C2.2 ; R6.1 4222.44,3224.88 C2.2 ; 3430.92,3515.92 3834,3919 4400,3919 4474,3845 4474,3152 4370,3152 4327,3195 C2.2
  Bottom Layer w10: I2C.1 1878.43,2605 S1.1 2158.43,2885 U2.3 ; S4.1 1473.85,2252 2456.43,2252 S2.1 ; J1.7 J1.6 3151.3,3723.7 PS.2
NetBt1_1: Bt1.1 U1.56
NetBt1_2: Bt1.2 U1.55 | length 1031.3
  Top Layer w10: v1(3630.17,2280.17) 3634.83,2280.17 3769.69,2145.31 4243.74,2145.31 4337.48,2239.06 Bt1.2
NetBt1_12: Bt1.12 C2.1 LM.2 R5.1 | length 1295.5
  Top Layer w10: C2.1 4417,3195 v1@4417,3342 ; v1(4509,2871) 4509,2860 4539.39,2829.61 Bt1.12 ; v1@4417,3342 4418.28,3342.96 v1@4419.19,3343.64 ; v1@4417,3342 v1(4419,3342) v1@4419.19,3343.64 ; v1@4419.19,3343.64 R5.1 4425,3348 v1@4419.19,3343.64
  Bottom Layer w10: LM.2 4419,3641 v1(4419,3342) 4419,2961 v1(4509,2871)
NetC4_1: C4.1 R4.1 S1.2 U1.65 | length 860.1
  Top Layer w10: S1.2 1682.44,2605.87 R4.1 1682.44,2320 1731.44,2271 1924,2271 1973,2320 1973,2380 1998,2405 C4.1
NetC5_1: C5.1 R7.1 S2.2 U1.66 | length 561.3
  Top Layer w10: S2.2 2255,2113.43 2255,1850 2267.56,1837.44 R7.1 2331,1837.44 2383.56,1890 C5.1
NetC6_1: C6.1 R8.1 S3.2 U1.78 | length 2138
  Top Layer w10: R8.1 1814,1220 1814,1309 1925,1420 C6.1 1937.68,1559 1953.43,1574.75 S3.2 2415,1715 2453.86,1753.86 2462.14,1753.86 2468,1748 2468,1618.72 2529.25,1557.46 2529.25,1528.12 2553.12,1504.25 2586.88,1504.25 2610.75,1528.12 2610.75,1680.97 2534.65,1757.07 2534.65,1923.77 2623.75,2012.87 2767.87,2012.87
NetC7_1: C7.1 R9.1 S4.2 U1.79 | length 2545.6
  Top Layer w10: v1@1105,2145 S4.2 1170,2000.32 1182.32,1988 C7.1 1182.32,1764.12 1232.44,1714 R9.1
  Bottom Layer w10: v1(1085,2145) 1305,1925 2884.14,1925 2890,1930.86 2890,1970 2885,1975
NetD1_2: D1.2 K1.A2 Q1.3 | length 828.4
  Top Layer w10: D1.2 3100,1440 Q1.3 3358.62,1275 K1.A2
NetI2C_3: I2C.3 U1.67
NetI2C_4: I2C.4 U1.68
NetJ1_2: J1.2 U1.15
NetJ1_3: J1.3 U1.16
NetJ2_1: J2.1 K1.NO | length 454.8
  Bottom Layer w10: K1.NO 4011.38,1175 J2.1
NetJ2_2: J2.2 K1.COM | length 998.9
  Bottom Layer w10: K1.COM J2.2
NetJ2_3: J2.3 K1.NC | length 454.8
  Bottom Layer w10: K1.NC 4011.38,1575 J2.3
NetLM_1: LM.1 R5.2 R6.2 | length 445.2
  Top Layer w10: R6.2 4333,3415 4378,3460 R5.2 4425,3602 4415,3612 LM.1
NetPS_1: PS.1 U1.18
NetQ1_1: Q1.1 R3.2 | length 206
  Top Layer w10: R3.2 2837.56,1270.56 2879.4,1312.4 Q1.1
NetR1_1: R1.1 U2.2 | length 248.4
  Top Layer w10: U2.2 2720,2835 2740,2855 R1.1
NetR1_2: R1.2 U1.24 | length 1132.2
  Top Layer w10: R1.2 2905.12,2715.86 2910.98,2710 3530,2710 3540,2700 3540,2530.86 3534.14,2525 3426.41,2525 3420.55,2530.86 3416.23,2526.54 U1.24
NetR2_1: R2.1 U1.91 | length 2818.8
  Top Layer w10: R2.1 2192.44,1192.56 2195,1190
  Bottom Layer w10: v1(2220,1175) 3080,1175 3385,1480 3700,1480 3710,1490 3710,1769.14 3704.14,1775 3120.86,1775 3115,1780.86 3115,1975 3125,1985
NetR2_2: R2.2 U3.1 | length 235.2
  Top Layer w10: R2.2 2415,1300 U3.1
NetR3_1: R3.1 U3.3 | length 2007
  Top Layer w10: U3.3 2488,1627 2488,2006 2478,2016 2478,2230 2661,2230 2691,2200 2691,2083.57 2721.7,2052.87 2784.44,2052.87 2807.87,2029.44 2807.87,1996.31 2784.44,1972.87 2778.86,1972.87 2773,1967.02 2773,1245 R3.1
VCC: C1.1 I2C.2 J1.1 PS.3 R4.2 R7.2 R8.2 R9.2 U2.1 | length 7343.5
  Top Layer w10: R8.2 1880,1190 1840,1150 1308,1150 1297.56,1160.44 R9.2 1284,1810 1284,2654 I2C.2 1700,2705 1710,2715 1780,2715 1792,2703 1792,2407 1780,2395 R4.2 1747.56,2374.44 1760,2362 1946,2362 1946,2497 2221,2772 2221,2845 C1.1 ; R7.2 2290,2000 2376,2086 2376,2696.17 C1.1 ; J1.1 2525.55,3668 2337,3479.45 2337,2808 2360,2785 ; U2.1 2360,2785 ; C1.1 2277,2845 2337,2785 2360,2785
  Bottom Layer w10: U2.1 2800,2785 PS.3
pads on no net: Bt1.3 Bt1.4 Bt1.5 Bt1.6 Bt1.7 Bt1.8 Bt1.9 Bt1.10 Bt1.11 Bt1.13 Bt1.14 Bt1.15 Bt1.16 Bt1.17 Bt1.18 Bt1.19 Bt1.20 Bt1.21 Bt1.23 Bt1.24 Bt1.25 Bt1.26 Bt1.27 Bt1.28 Bt1.29 Bt1.30 Bt1.31 Bt1.32 Bt1.33 Bt1.34 DS1.1 DS1.2 DS1.3 DS1.4 DS1.5 DS1.6 DS1.7 DS1.8 DS1.9 DS1.10 J1.4 PS.4 PS.5 PS.6 U1.1 U1.2 U1.3 U1.4 U1.5 U1.6 U1.7 U1.8 U1.9 U1.10 U1.11 U1.12 U1.13 U1.14 U1.17 U1.19 U1.20 U1.21 U1.22 U1.23 U1.25 U1.26 U1.27 U1.28 U1.29 U1.30 U1.31 U1.32 U1.33 U1.34 U1.35 U1.36 U1.37 U1.38 U1.39 U1.40 U1.41 U1.42 U1.43 U1.44 U1.45 U1.46 U1.47 U1.48 U1.49 U1.50 U1.51 U1.52 U1.53 U1.54 U1.57 U1.58 U1.59 U1.60 U1.61 U1.62 U1.63 U1.64 U1.69 U1.70 U1.71 U1.72 U1.73 U1.74 U1.75 U1.76 U1.77 U1.80 U1.81 U1.82 U1.83 U1.84 U1.85 U1.86 U1.87 U1.88 U1.89 U1.90 U1.92 U1.93 U1.94 U1.95 U1.96 U1.97 U1.98 U1.99 U1.100 U.1 U.2 U.3 U.4 U.5 U.6 U.7 U.8 U.9 U.10
copper on no net: | length 1440.2
  Top Layer w10: 2217.44,3197.56 2220,3195
  Bottom Layer w10: 2740,2475 2525,2475 2519.14,2469.14 2519.14,2460.86 2535,2445 3521.92,2445 3620,2346.92 3620,2290

## Polygon pours and split planes (outlines as drawn)
VCC on Top Layer "VCC_L01_P000" (solid, pour order 0): 4695,4035 4690,4030 4690,1035 1030,1035 1030,4020 1050,4040

## Text inside footprints (layer, text, board x,y; h text height)
Bt1: Mechanical 13 "ANTENNA" at 4460.91,2035.91 h50 r180
J1: Mechanical 1 "PCB EDGE" at 2757.83,3891.02 h11.81 r180
U2: Top Overlay "1" at 2695.16,2757.09 h59.05; Top Overlay "3" at 2695.16,2853.39 h59.05